# Altium PCB LedRing.PcbDoc
Units mil, origin at the board's own origin, x right, y up, seen from the top; angles counter-clockwise.
Board outline 1874.02 x 1874.02 mil, 2 copper layers (Top1, Bottom4), stack 42.17 mil thick; 12 components, 14 nets, 51 pads, 3 vias.
Unrouted connection lines stored in the file: 28.
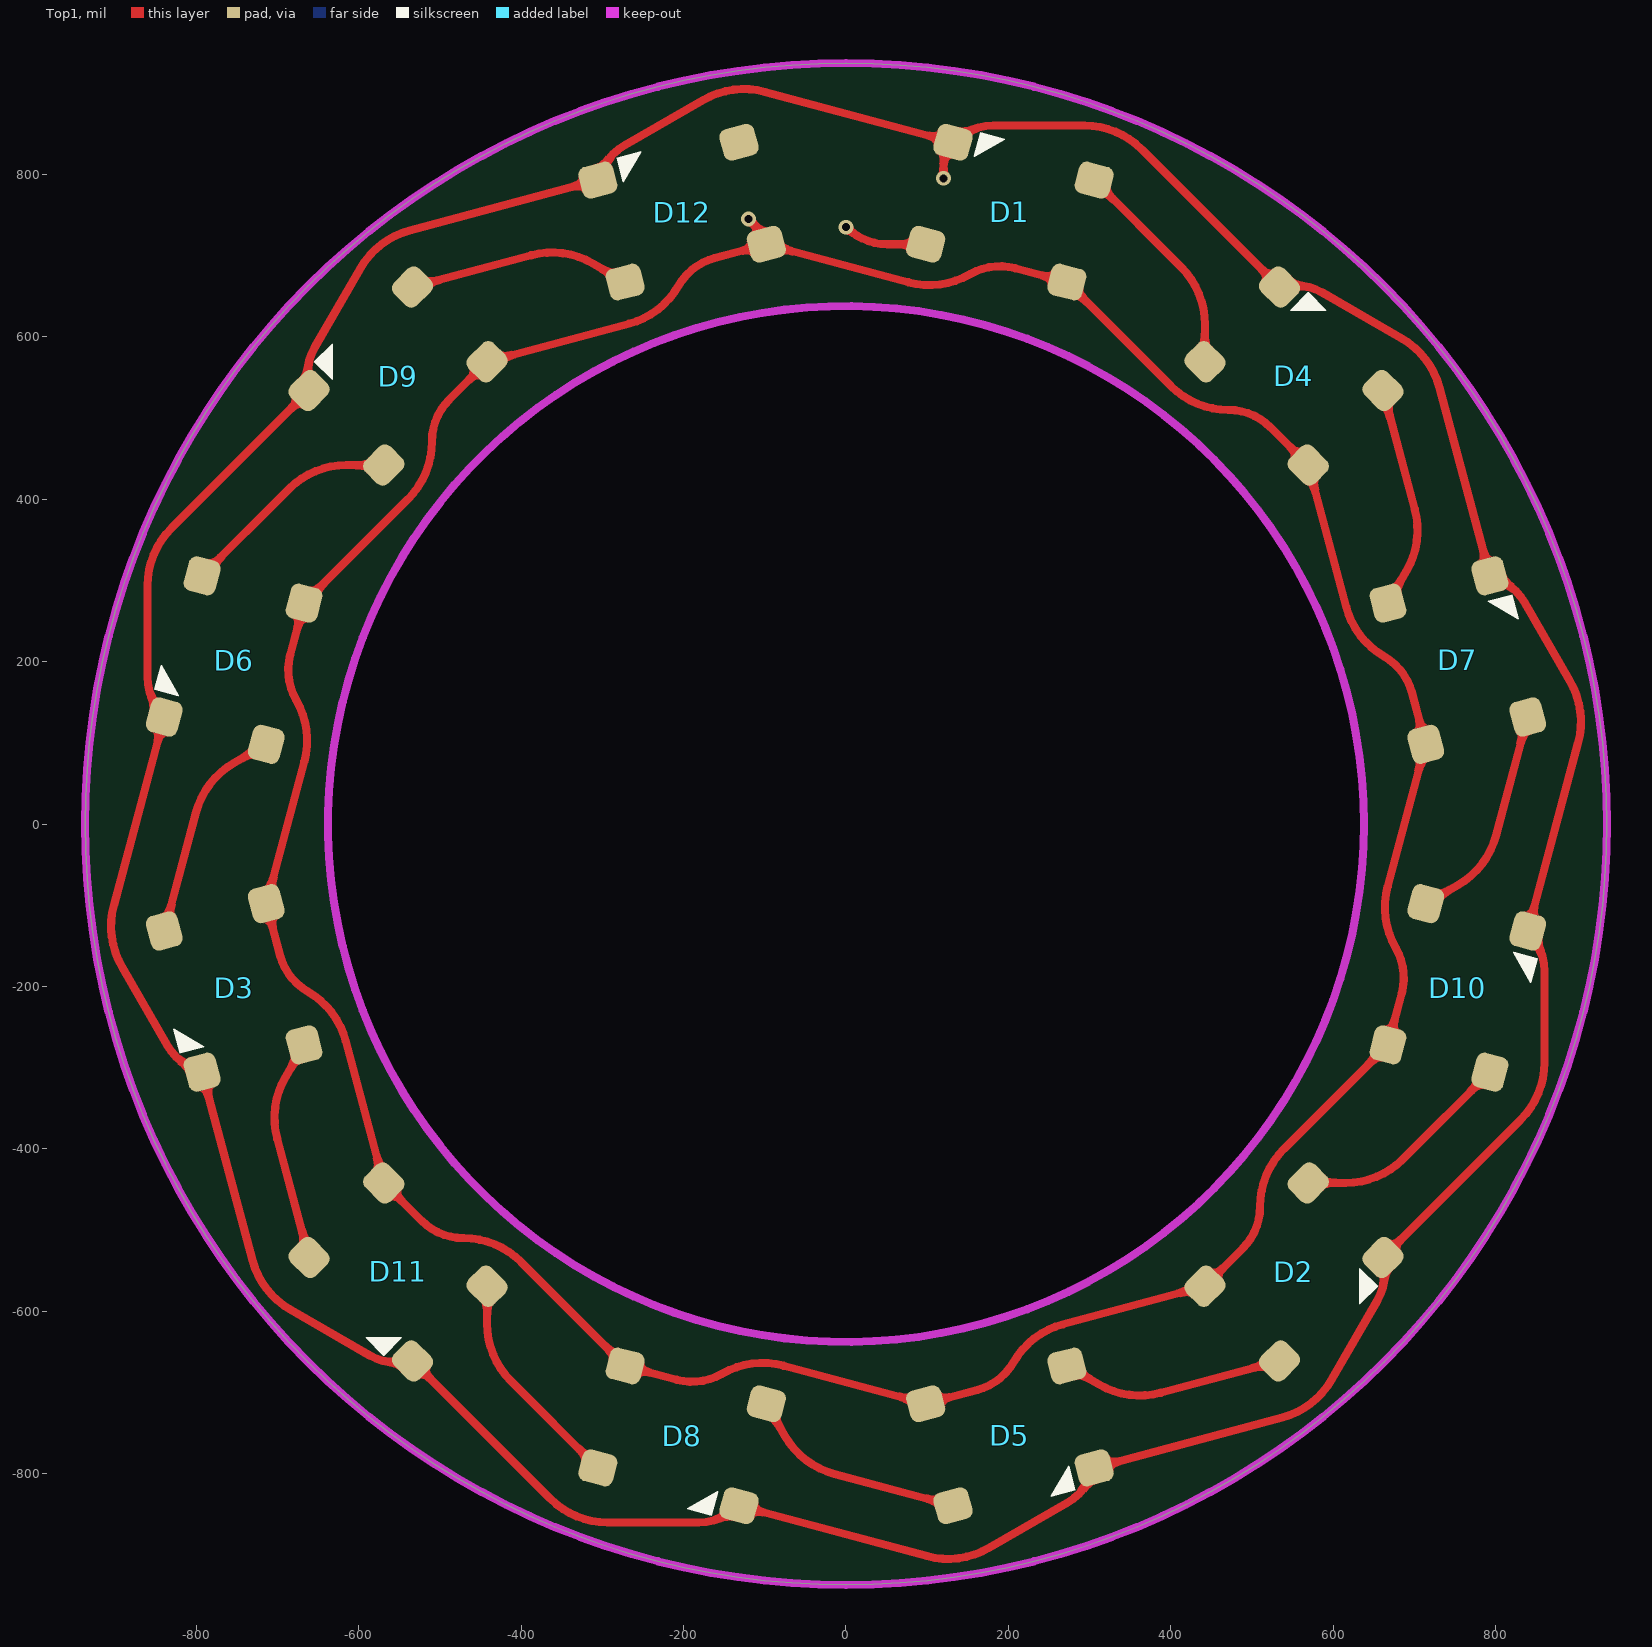
[diagram p0: Top1 view]
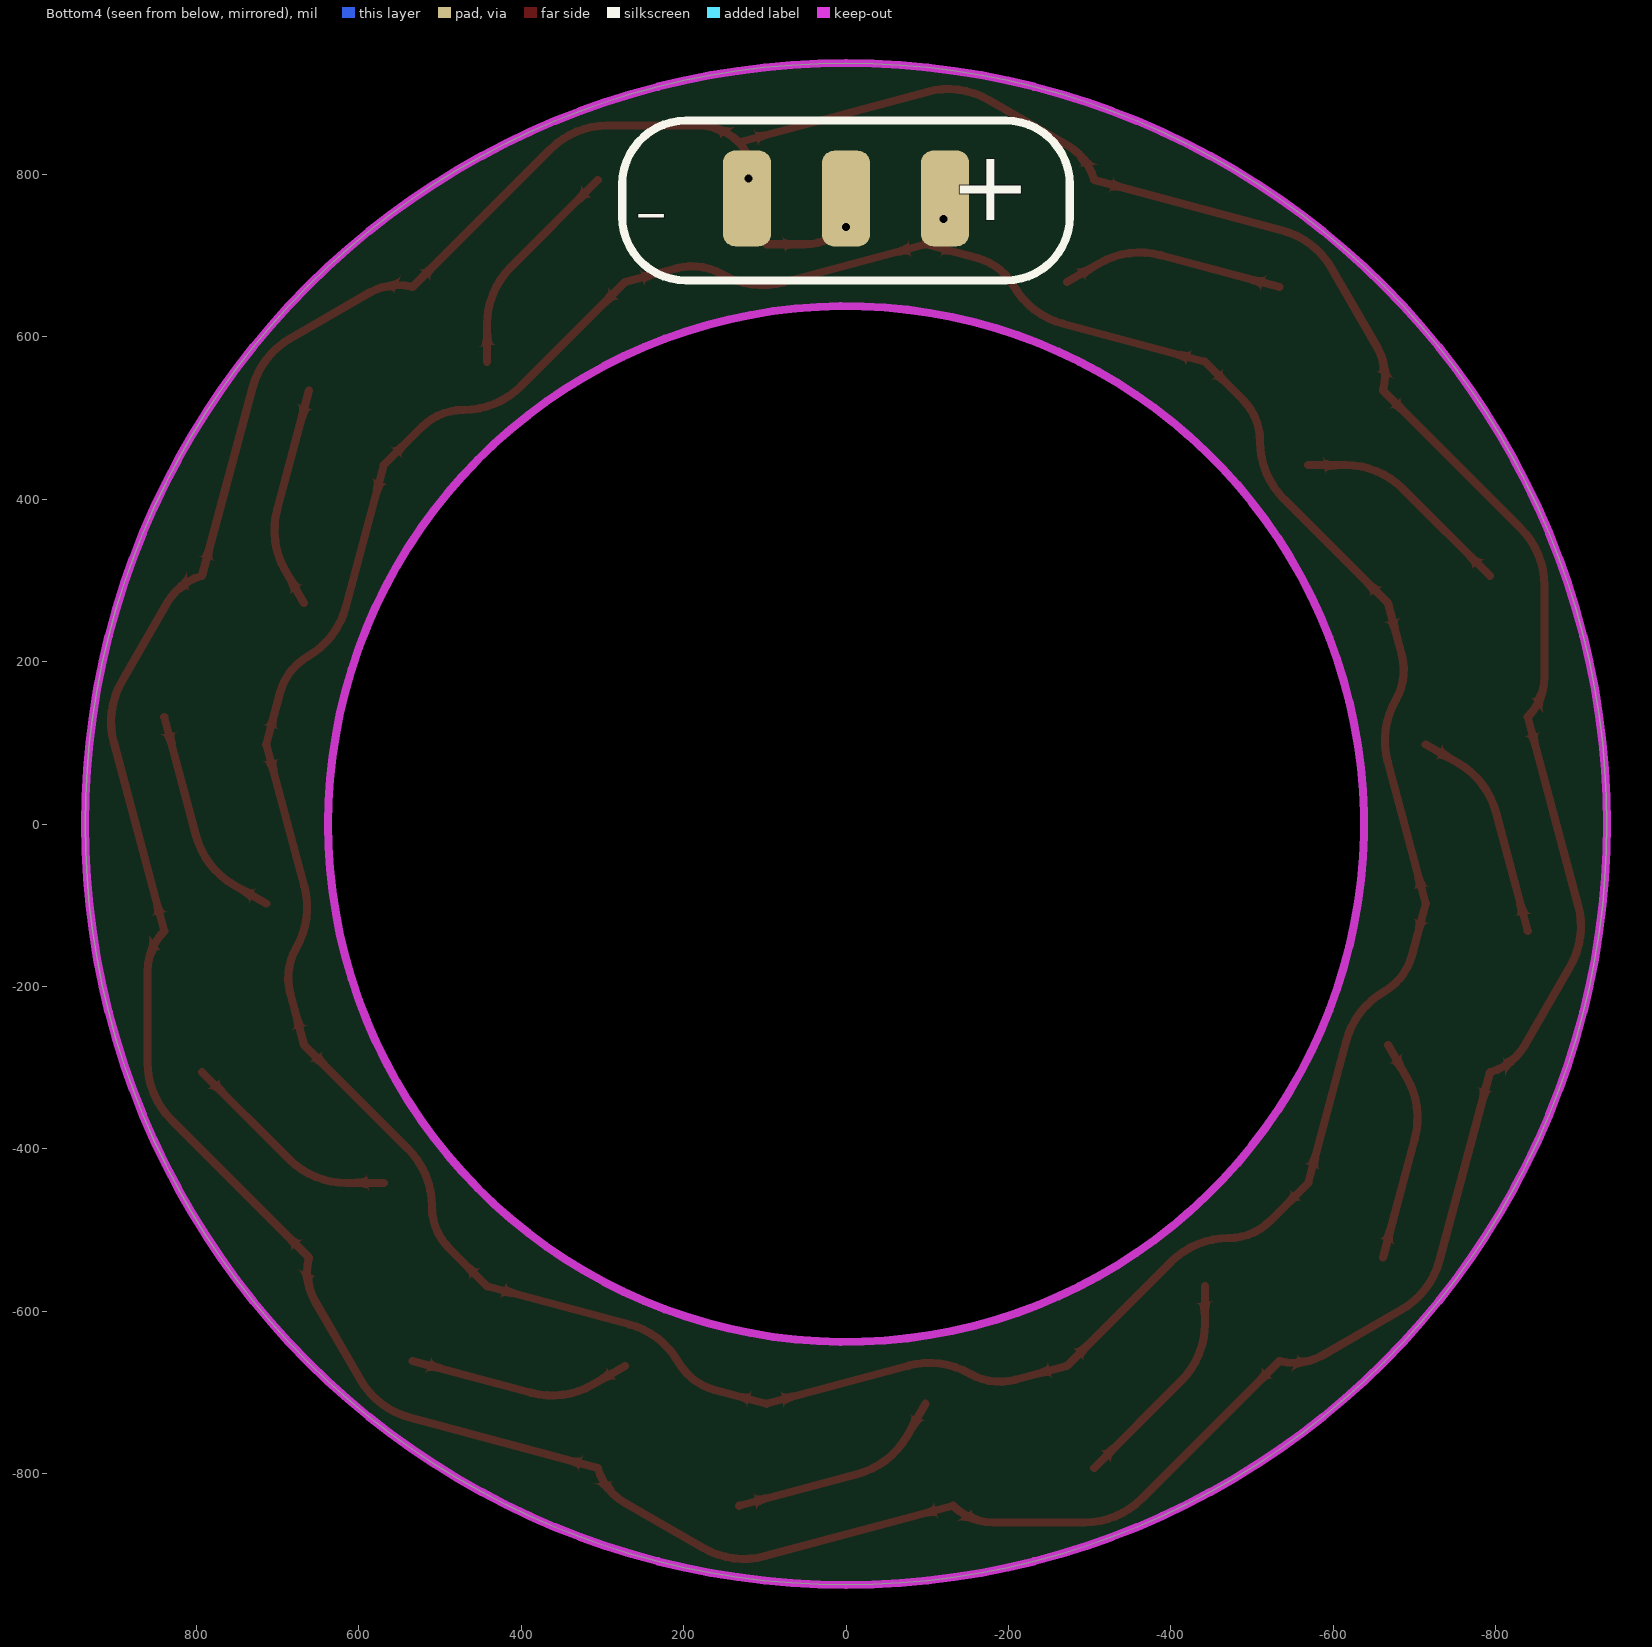
[diagram p1: Bottom4 view, seen from below]
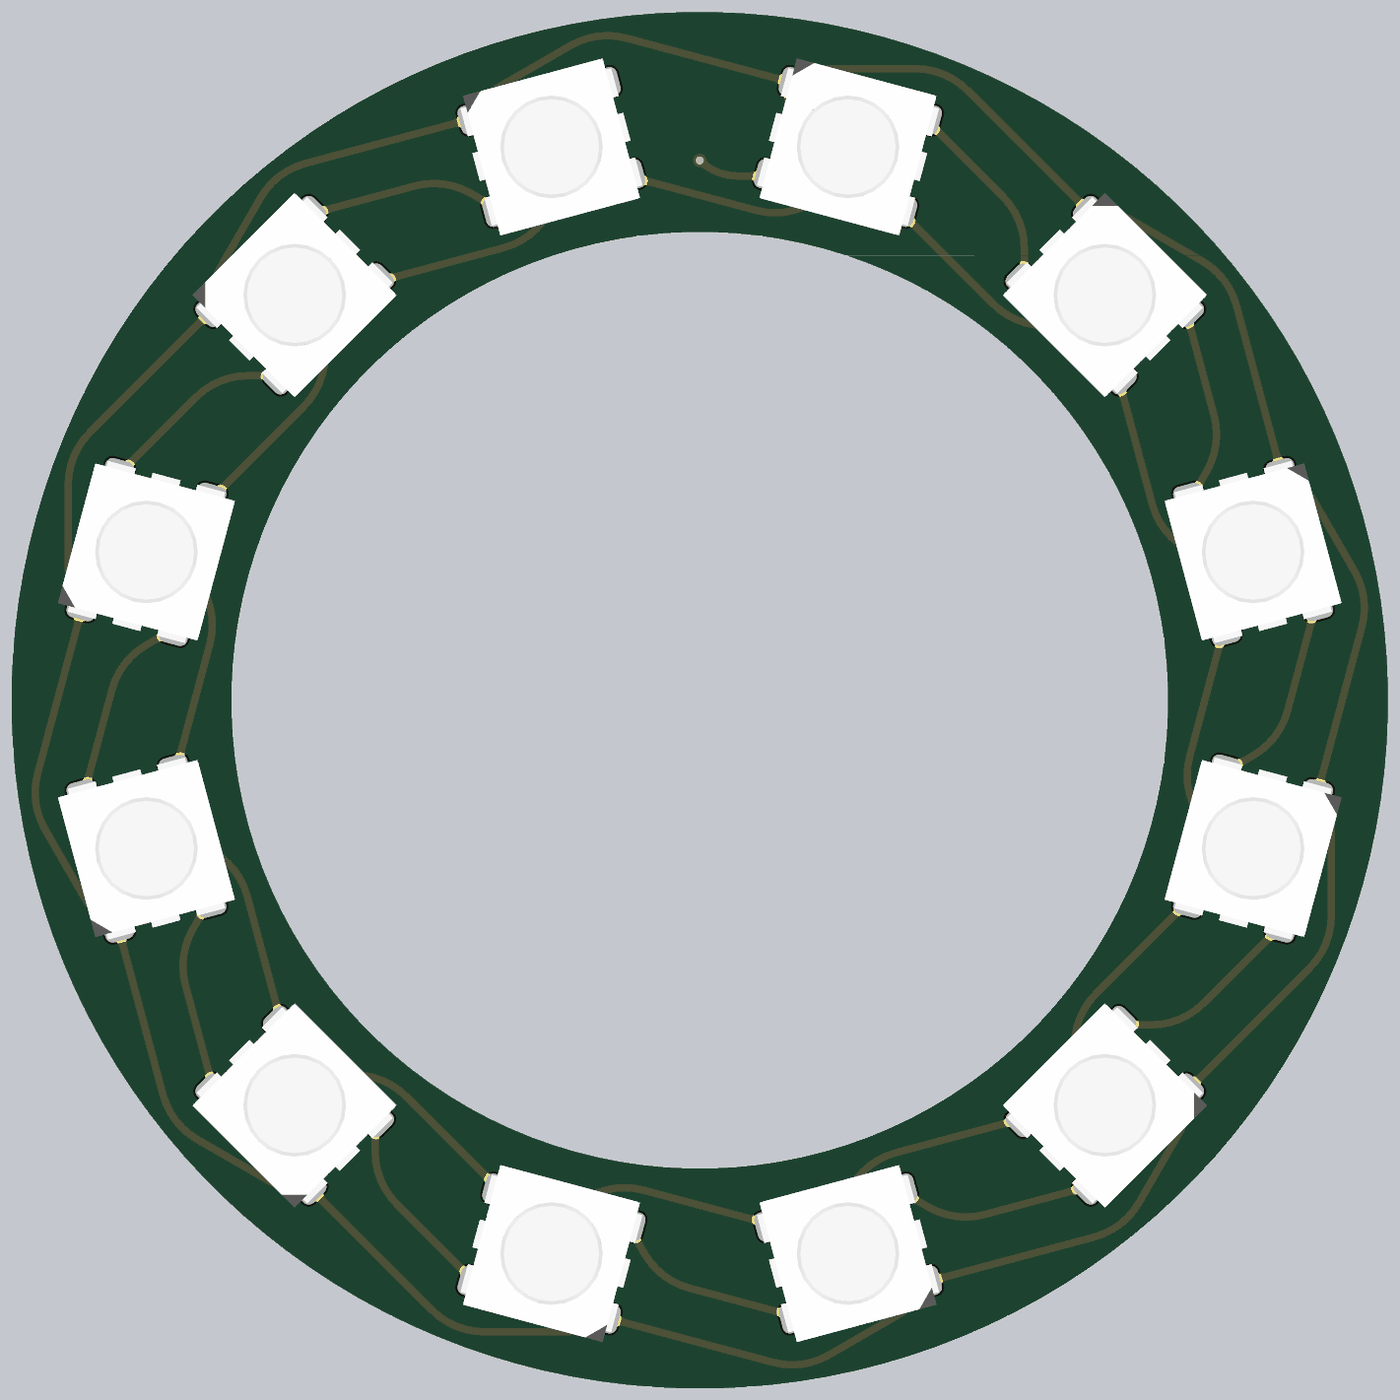
[diagram p2: 3D render of the assembled board from above, using the file's embedded part models]

## Layer stack, top to bottom
Top Solder: solder mask 0.4, Solder Resist, Dk 3.5
Top1: signal copper 1.4
Dielectric 2: core 39.37, PP-006, Dk 4.2
Bottom4: signal copper 1.4
Bottom Solder: solder mask 0.4, Solder Resist, Dk 3.5

## Board outline
-937.01,0 ccw(c0,0) 0,-937.01 ccw(c0,0) 937.01,0 ccw(c0,0) 0,937.01 ccw(c0,0)
cut-out: -637.8,0 ccw(c0,0) 0,-637.8 ccw(c0,0) 637.8,0 ccw(c0,0) 0,637.8 ccw(c0,0)

## Design rules (kind name [scope] priority, off if disabled: settings)
Clearance [All] p1: gap=5 ignorepadtopadclearanceinfootprint=FALSE
ComponentClearance [All] p1: gap=0 collisioncheckmode=3 verticalgap=0 showdistances=FALSE
DiffPairsRouting [All] p1: maxlimit=9 minlimit=9 mostfreqgap=9 toplayer_minwidth=4 toplayer_maxwidth=4 toplayer_prefwidth=4 bottomlayer_minwidth=4 bottomlayer_maxwidth=4 bottomlayer_prefwidth=4 maxuncoupledlength=500
FanoutControl Fanout_BGA [All] p1: bgadir=Out bgaviamode=Centered fanoutstyle=Auto fanoutdirection=Alternating viagrid=1 // Fanout_BGA (Default Rule)
HoleSize [All] p1: absolutevalues=TRUE maxlimit=10000 minlimit=8 maxpercent=80.000 minpercent=20.000
MinimumSolderMaskSliver [All] p1 off: minsoldermaskwidth=2
PlaneClearance [All] p1: clearance=8
PlaneConnect [All] p1: planeconnectstyle=Direct reliefexpansion=20 reliefentries=4 reliefconductorwidth=10 reliefairgap=10
PolygonConnect [All] p1: connectstyle=Direct reliefconductorwidth=10 reliefentries=4 polygonreliefangle="90 Angle" airgapwidth=10
RoutingVias [All] p1: holewidth=8 width=16 viastyle="Through Hole" minholewidth=6 minwidth=12 maxholewidth=28 maxwidth=50
SilkToBoardRegionClearance [All] p1 off:
SilkToSilkClearance [All] p1: silktosilkclearance=0
SilkToSolderMaskClearance [IsPad] p1: minsilkscreentomaskgap=0 clearancetoexposedcopper=TRUE
SolderMaskExpansion [All] p1: expansion=3 istentingtop=FALSE
Width [All] p1: maxlimit=10000 minlimit=4 preferedwidth=4
20 further rules are at their usual default settings.

## Components (designator, comment, footprint, x,y, rotation, side; value= is the part's Value field where it differs from the comment)
D1 "RGB" LED_5050_WS2812B 201.88,753.42 r165 top
D2 "RGB" LED_5050_WS2812B 551.54,-551.54 r45 top
D3 "RGB" LED_5050_WS2812B -753.42,-201.88 r285 top
D4 "RGB" LED_5050_WS2812B 551.54,551.54 r135 top
D5 "RGB" LED_5050_WS2812B 201.88,-753.42 r15 top
D6 "RGB" LED_5050_WS2812B -753.42,201.88 r255 top
D7 "RGB" LED_5050_WS2812B 753.42,201.88 r105 top
D8 "RGB" LED_5050_WS2812B -201.88,-753.42 r345 top
D9 "RGB" LED_5050_WS2812B -551.54,551.54 r225 top
D10 "RGB" LED_5050_WS2812B 753.42,-201.88 r75 top
D11 "RGB" LED_5050_WS2812B -551.54,-551.54 r315 top
D12 "RGB" LED_5050_WS2812B -201.88,753.42 r195 top

## Footprints (in the part's own frame and the unit in brackets; to place one, negate y for a bottom-side part, rotate by r counter-clockwise, add the part's x,y. Pads: shape width x height; smd on the part's side, far side on the other; paste and mask are expansions set on the pad)
LED_5050_WS2812B [mil]
  rrect50% 44x40 smd: 1(-90,65) 2(-90,-65) 3(90,-65) 4(90,65)
  silkscreen extent 30,-85 60,-55, body extent -106,-98 106,98, height 69

## Part data
D1 D2 D3 D4 D5 D6 D7 D8 D9 D10 D11 D12: library part LED_5050_WS2812B, "LED", Type=5050

## Free pads (board coordinates)
  rrect50% 59.06x118.11 smd far side: ""(-122.02,770.4) ""(0,770) ""(122.02,770.4)

## Via types
v1: diameter 18, hole 10, Top1 to Bottom4, tented both sides, 3 vias

## Nets (pads, with @x,y where several pads share a name; then routed paths per layer and width w, separated by ;. In a path a pad name is that pad's centre, name@x,y a point inside that pad or via, vN(x,y) a via of type N, cw(c..) or ccw(c..) an arc to the next point about the centre after c; other vN are vias at no path point)
GND: D1.3 D2.3 D3.3 D4.3 D5.3 D6.3 D7.3 D8.3 D9.3 D10.3 D11.3 D12.3 pad.@122.02,770.4 | length 6008.9
  Top1 w10: -730.85,-537.27 D3.3 cw(c-774.8,-238.03) -835.41,-273.03 -891.58,-175.74 cw(c-804.97,-125.74) -901.57,-99.86 D6.3 cw(c-790.01,181.26) -860,181.26 -860,293.59 cw(c-760,293.59) -830.71,364.3 D9.3 cw(c-593.54,551.98) -654.15,586.97 -597.99,684.26 cw(c-511.38,634.26) -537.27,730.85 D12.3 cw(c-238.03,774.8) -273.03,835.41 -175.74,891.58 cw(c-125.74,804.97) -99.86,901.57 D1.3 ; -730.85,-537.27 ccw(c-634.26,-511.38) -684.26,-597.99 -586.97,-654.15 ccw(c-551.98,-593.54) D11.3 -364.3,-830.71 ccw(c-293.59,-760) -293.59,-860 -181.26,-860 ccw(c-181.26,-790.01) D8.3 99.86,-901.57 ccw(c125.74,-804.97) 175.74,-891.58 273.03,-835.41 ccw(c238.03,-774.8) D5.3 537.27,-730.85 ccw(c511.38,-634.26) 597.99,-684.26 654.15,-586.97 ccw(c593.54,-551.98) D2.3 830.71,-364.3 ccw(c760,-293.59) 860,-293.59 860,-181.26 ccw(c790.01,-181.26) D10.3 901.57,99.86 ccw(c804.97,125.74) 891.58,175.74 835.41,273.03 ccw(c774.8,238.03) D7.3 730.85,537.27 ccw(c634.26,511.38) 684.26,597.99 586.97,654.15 ccw(c551.98,593.54) D4.3 364.3,830.71 ; v1(120,795) 120,811.09 cw(c160.18,811.09) D1.3 ; D1.3 cw(c181.26,790.01) 181.26,860 ; D1.3 cw(c181.26,790.01) 181.26,860 ; 181.26,860 293.59,860 ; 293.59,860 cw(c293.59,760) 364.3,830.71 ; 293.59,860 cw(c293.59,760) 364.3,830.71
NetD1_2: D1.2 D4.4 | length 551.7
  Top1 w10: 412.65,685.9 cw(c341.94,615.19) 441.94,615.19 ; 412.65,685.9 cw(c341.94,615.19) 441.94,615.19 ; 412.65,685.9 D1.2 412.65,685.9 ; 441.94,615.19 D4.4 441.94,615.19
NetD2_2: D2.2 D5.4 | length 275.8
  Top1 w10: D5.4 311.8,-690.33 ccw(c361.8,-603.72) 387.68,-700.32 D2.2
NetD2_4: D2.4 D10.2 | length 275.8
  Top1 w10: D2.4 615.19,-441.94 ccw(c615.19,-341.94) 685.9,-412.65 D10.2
NetD3_2: D3.2 D6.4 | length 275.8
  Top1 w10: D3.2 -800.33,14.42 cw(c-703.74,-11.46) -753.74,75.14 D6.4
NetD3_4: D3.4 D11.2 | length 275.8
  Top1 w10: D3.4 -690.33,-311.8 ccw(c-603.72,-361.8) -700.32,-387.68 D11.2
NetD4_2: D4.2 D7.4 | length 275.8
  Top1 w10: D4.2 700.32,387.68 cw(c603.72,361.8) 690.33,311.8 D7.4
NetD5_2: D5.2 D8.4 | length 275.8
  Top1 w10: D8.4 -75.14,-753.74 ccw(c11.46,-703.74) -14.42,-800.33 D5.2
NetD6_2: D6.2 D9.4 | length 275.8
  Top1 w10: D6.2 -685.9,412.65 cw(c-615.19,341.94) -615.19,441.94 D9.4
NetD7_2: D7.2 D10.4 | length 275.8
  Top1 w10: D10.4 753.74,-75.14 ccw(c703.74,11.46) 800.33,-14.42 D7.2
NetD8_2: D8.2 D11.4 | length 275.8
  Top1 w10: D11.4 -441.94,-615.19 ccw(c-341.94,-615.19) -412.65,-685.9 D8.2
NetD9_2: D9.2 D12.4 | length 275.8
  Top1 w10: D9.2 -387.68,700.32 cw(c-361.8,603.72) -311.8,690.33 D12.4
RGB_LED: D1.4 pad.@0,770 | length 103.8
  Top1 w10: v1(0,735) ccw(c50.87,785.87) 50.87,713.93 D1.4
VDD_5V: D1.1 D2.1 D3.1 D4.1 D5.1 D6.1 D7.1 D8.1 D9.1 D10.1 D11.1 D12.1 pad.@-122.02,770.4 | length 4773
  Top1 w10: v1(-120,745) -104.62,729.62 cw(c-120.31,713.93) D12.1 ; D12.1 76.8,667.06 ccw(c102.68,763.65) 152.68,677.05 cw(c189.39,613.47) 208.39,684.38 D1.1 400.04,539.29 ; D12.1 -161.72,696.89 ccw(c-142.72,625.98) -206.3,662.68 cw(c-292.9,712.68) -267.02,616.09 D9.1 -488.5,522.67 ccw(c-436.59,470.75) -510,470.75 cw(c-610,470.75) -539.29,400.04 D6.1 -684.38,208.39 ccw(c-613.47,189.39) -677.05,152.68 cw(c-763.65,102.68) -667.06,76.8 D3.1 -696.89,-161.72 ccw(c-625.98,-142.72) -662.68,-206.3 cw(c-712.68,-292.9) -616.09,-267.02 D11.1 -522.67,-488.5 ccw(c-470.75,-436.59) -470.75,-510 cw(c-470.75,-610) -400.04,-539.29 D8.1 -208.39,-684.38 ccw(c-189.39,-613.47) -152.68,-677.05 cw(c-102.68,-763.65) -76.8,-667.06 D5.1 161.72,-696.89 ccw(c142.72,-625.98) 206.3,-662.68 cw(c292.9,-712.68) 267.02,-616.09 D2.1 488.5,-522.67 ccw(c436.59,-470.75) 510,-470.75 cw(c610,-470.75) 539.29,-400.04 D10.1 684.38,-208.39 ccw(c613.47,-189.39) 677.05,-152.68 cw(c763.65,-102.68) 667.06,-76.8 D7.1 696.89,161.72 ccw(c625.98,142.72) 662.68,206.3 cw(c712.68,292.9) 616.09,267.02 D4.1 522.67,488.5 ; 400.04,539.29 ccw(c470.75,610) 470.75,510 ; 400.04,539.29 ccw(c470.75,610) 470.75,510 ; 470.75,510 cw(c470.75,436.59) 522.67,488.5 ; 470.75,510 cw(c470.75,436.59) 522.67,488.5
pads on no net: D12.2

## Keep-outs
Keep-Out Layer:
  circle w10: c0,0 r637.8
  circle w10: c0,0 r937.01
  circle w10: c0,0 r637.8

## Other copper
Top1:
  text "板形状中间挖槽" at -489.81,1116.84 h150

## Silkscreen, mask and mechanical layers (free items; w line width, h text height)
Bottom Overlay:
  lines w10: -275.59,748.03 ccw(c-196.85,748.03) -196.85,669.29 196.85,669.29 ccw(c196.85,748.03) 275.59,748.03 275.59,787.4 ccw(c196.85,787.4) 196.85,866.14 -196.85,866.14 ccw(c-196.85,787.4) -275.59,787.4 -275.59,748.03
  text "+" at -127.78,714.68 h150
  text "-" at 261.58,689.68 h150
Mechanical 1:
  circle w10: c0,0 r637.8
  circle w10: c0,0 r937.01
  circle w10: c0,0 r637.8